# Altium PCB ST_linkV2.PcbDoc
Units mil, origin at the board's own origin, x right, y up, seen from the top; angles counter-clockwise.
Board outline 1200 x 600 mil, 2 copper layers (Top Layer, Bottom Layer); 31 components, 25 nets, 122 pads, 17 vias.
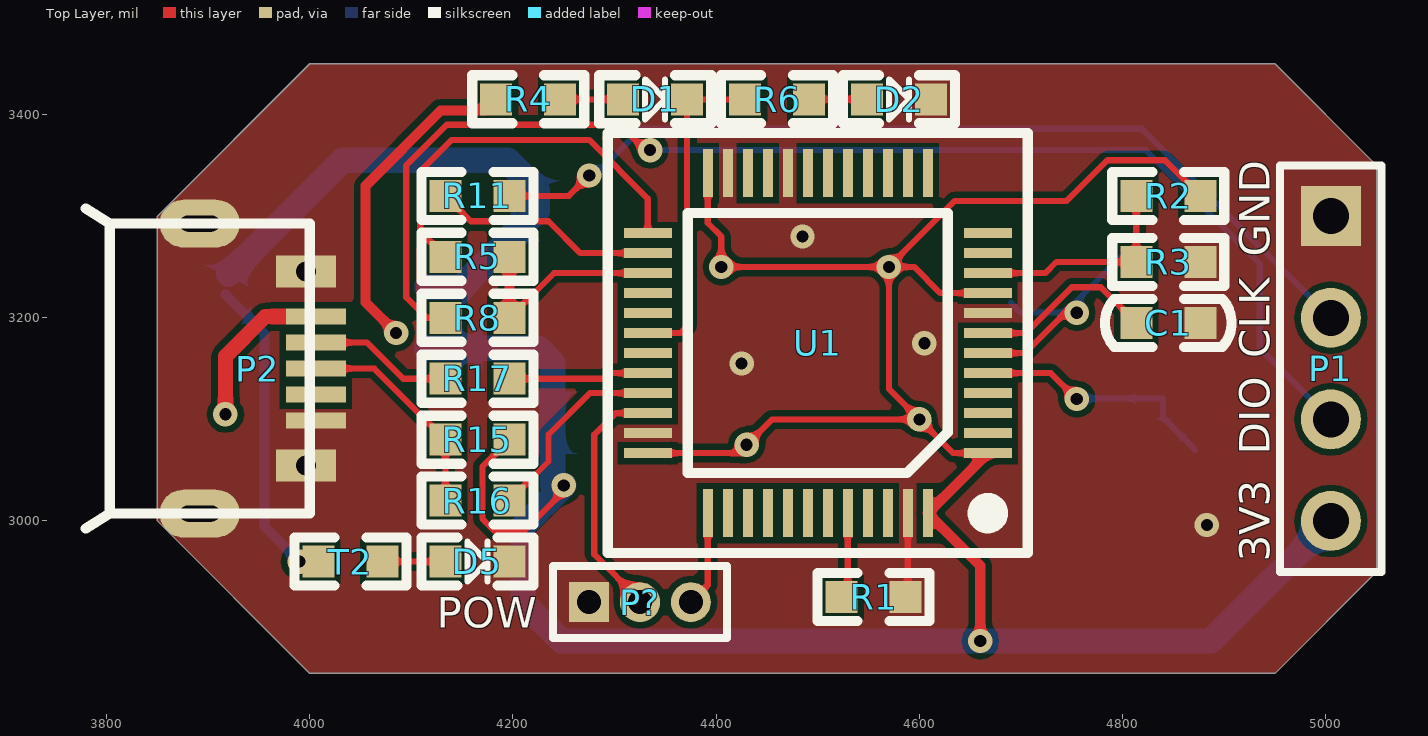
[diagram p0: Top Layer view]
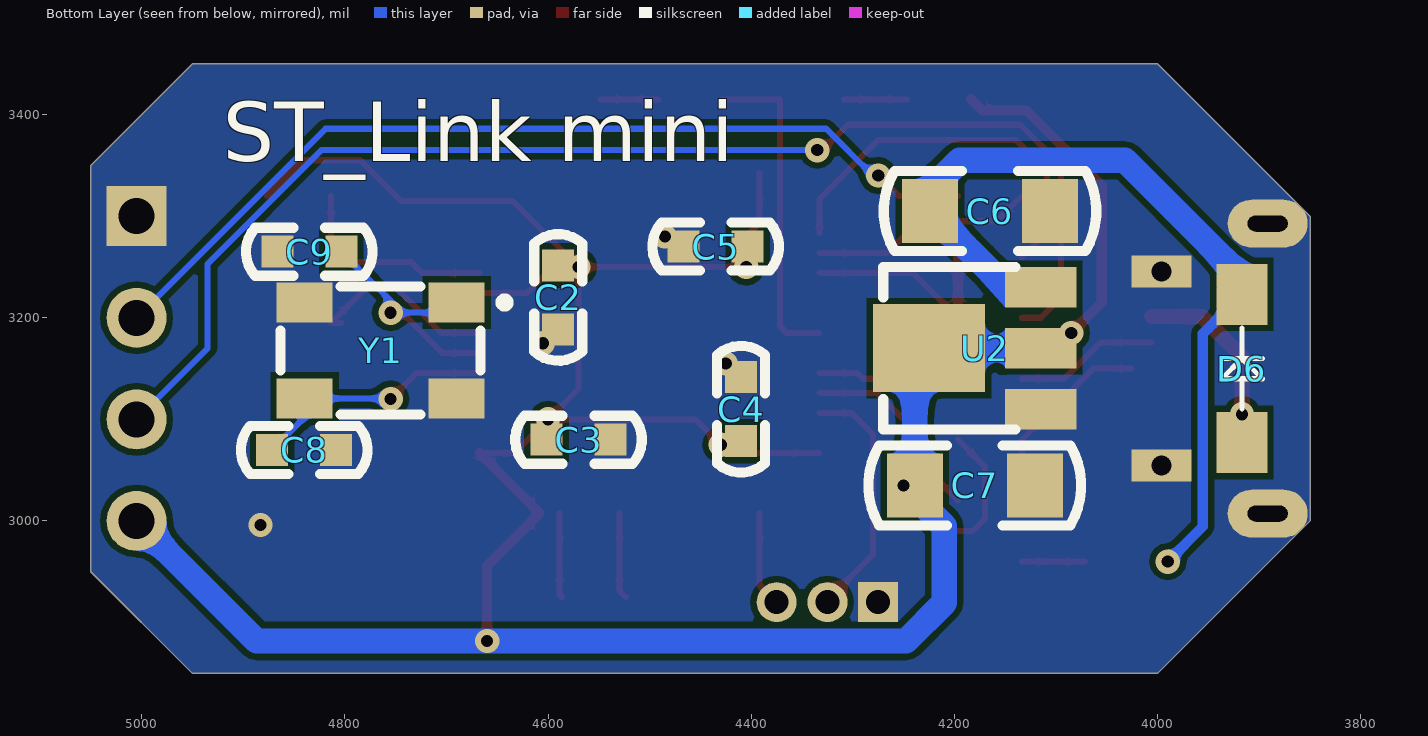
[diagram p1: Bottom Layer view, seen from below]
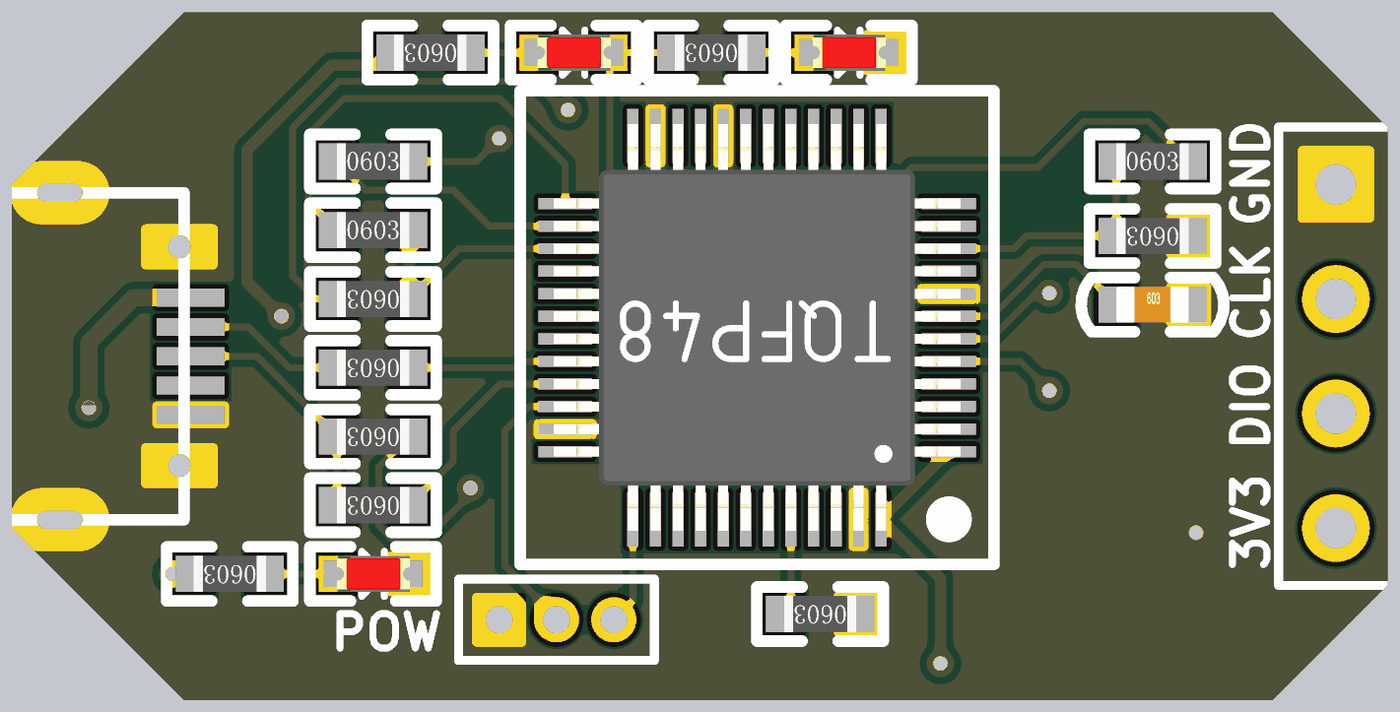
[diagram p2: 3D render of the assembled board from above, using the file's embedded part models]
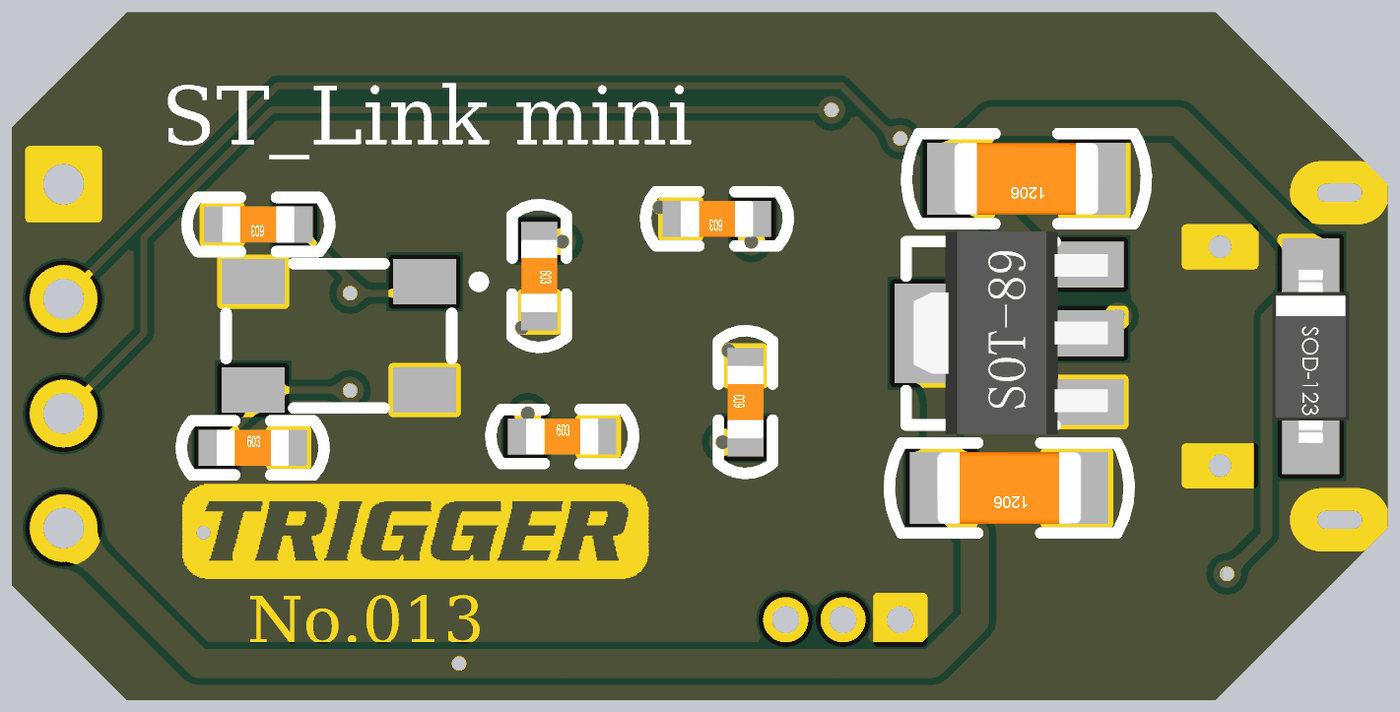
[diagram p3: 3D render of the assembled board from below, using the file's embedded part models]

## Layer stack, top to bottom
Top Solder: solder mask 0.4, Solder Resist, Dk 3.5
Top Layer: signal copper 1.4
Dielectric 1: dielectric 12.6, FR-4, Dk 4.8
Bottom Layer: signal copper 1.4
Bottom Solder: solder mask 0.4, Solder Resist, Dk 3.5

## Board outline
3850,3000 3850,3300 4000,3450 4950,3450 5050,3350 5050,2950 4950,2850 4000,2850

## Design rules (kind name [scope] priority, off if disabled: settings)
Clearance [All] p1: gap=6
ComponentClearance [All] p1 off: gap=10 collisioncheckmode=3 verticalgap=10 showdistances=FALSE
HoleSize [All] p1 off: absolutevalues=TRUE maxlimit=100 minlimit=1 maxpercent=80.000 minpercent=20.000
HoleToHoleClearance [All] p1 off: gap=10 allowstackedmicrovias=TRUE
LayerPairs [All] p1 off: enforce=TRUE
MinimumSolderMaskSliver [All] p1 off: minsoldermaskwidth=10
NetAntennae [All] p1 off: netantennaetolerance=0
PlaneConnect [All] p1: planeconnectstyle=Direct reliefexpansion=20 reliefentries=4 reliefconductorwidth=10 reliefairgap=10
PolygonConnect [All] p1: connectstyle=Direct reliefconductorwidth=10 reliefentries=4 polygonreliefangle="90 Angle" airgapwidth=10
RoutingVias [All] p1: holewidth=12 width=24 viastyle="Through Hole" minholewidth=12 minwidth=24 maxholewidth=12 maxwidth=24
SilkToSilkClearance [All] p1 off: silktosilkclearance=10
SilkToSolderMaskClearance [IsPad] p1 off: minsilkscreentomaskgap=10 clearancetoexposedcopper=TRUE
SolderMaskExpansion [All] p1: expansion=4
Width [All] p1: maxlimit=100 minlimit=6 preferedwidth=10
21 further rules are at their usual default settings.

## Components (designator, comment, footprint, x,y, rotation, side; value= is the part's Value field where it differs from the comment)
C1 "104" 电容_C0603 4845,3195 r0 top
C2 "104" 电容_C0603 4590,3220 r270 bottom
C3 "104" 电容_C0603 4570,3080 r180 bottom
C4 "104" 电容_C0603 4410,3110 r90 bottom
C5 "104" 电容_C0603 4435,3270 r0 bottom
C6 "10uF" 电容_C1206 4165,3305 r0 bottom
C7 "22uF" 电容_C1206 4180,3035 r0 bottom
C8 "22P" 电容_C0603 4840,3070 r180 bottom
C9 "22P" 电容_C0603 4835,3265 r0 bottom
D1 "red" LED_0603 4340,3415 r0 top
D2 "green" LED_0603 4580,3415 r0 top
D5 "red" LED_0603 4165,2960 r0 top
D6 "1N4007" 二极管_SOD-123 3917,3150 r90 bottom
P1 "Header 4" HDR1X4 5005,3300 r270 top
P2 "MICRO USB" "接插件_MICRO 牛角插座 USB 卷边" 4000,3150 r90 top
P? "MHDR1X3" MHDR1X3 4275,2920 r0 top
R1 "10K" 电阻_R0603 4555,2925 r180 top
R2 "4.7K" 电阻_R0603 4845,3320 r0 top
R3 "4.7K" 电阻_R0603 4845,3255 r180 top
R4 "1.5K" 电阻_R0603 4215,3415 r180 top
R5 "100R" 电阻_R0603 4165,3260 r0 top
R6 "1.5K" 电阻_R0603 4460,3415 r180 top
R8 "22R" 电阻_R0603 4165,3200 r180 top
R11 "22R" 电阻_R0603 4165,3320 r0 top
R15 "1.5K" 电阻_R0603 4165,3080 r180 top
R16 "4.7K" 电阻_R0603 4165,3020 r180 top
R17 "4.7K" 电阻_R0603 4165,3140 r180 top
T2 "1.5K" 电阻_R0603 4040,2960 r180 top
U1 "STM32F103C8T6" ST主控_LQFP48 4500,3175 r180 top
U2 "AMS1117" 稳压芯片_SOT-89 4115,3110 r90 bottom
Y1 "12M" 晶振_5032 4690,3215 r0 bottom

## Footprints (in the part's own frame and the unit in brackets; to place one, negate y for a bottom-side part, rotate by r counter-clockwise, add the part's x,y. Pads: shape width x height; smd on the part's side, far side on the other; paste and mask are expansions set on the pad)
HDR1X4 [mm] "Connector; Header; 4 Position"
  rect 1.5x1.5 hole 0.9: 1(0,0)
  round 1.5 hole 0.9: 2(2.54,0) 3(5.08,0) 4(7.62,0)
  silkscreen extent -1.27,-1.27 8.89,1.27
LED_0603 [mm]
  rect 0.8x0.8 smd paste-0.1: A(-0.8,0) K(0.8,0)
  silkscreen extent -1.4,-0.6 1.4,0.6, body extent -0.8,-0.4 0.82,0.4, height 0.6
MHDR1X3 [mm] "Connector; Header; 3 Position"
  rect 1x1 hole 0.6: 1(0,0)
  round 1 hole 0.6: 2(1.27,0) 3(2.54,0)
  silkscreen extent -0.9,-0.9 3.44,0.9
ST主控_LQFP48 [mm]
  rect 1.2x0.25 smd: 1(-4.25,2.75) 2(-4.25,2.25) 3(-4.25,1.75) 4(-4.25,1.25) 5(-4.25,0.75) 6(-4.25,0.25) 7(-4.25,-0.25) 8(-4.25,-0.75) 9(-4.25,-1.25) 10(-4.25,-1.75) 11(-4.25,-2.25) 12(-4.25,-2.75) 25(4.25,-2.75) 26(4.25,-2.25) 27(4.25,-1.75) 28(4.25,-1.25) 29(4.25,-0.75) 30(4.25,-0.25) 31(4.25,0.25) 32(4.25,0.75) 33(4.25,1.25) 34(4.25,1.75) 35(4.25,2.25) 36(4.25,2.75)
  rect 0.25x1.2 smd: 13(-2.75,-4.25) 14(-2.25,-4.25) 15(-1.75,-4.25) 16(-1.25,-4.25) 17(-0.75,-4.25) 18(-0.25,-4.25) 19(0.25,-4.25) 20(0.75,-4.25) 21(1.25,-4.25) 22(1.75,-4.25) 23(2.25,-4.25) 24(2.75,-4.25) 37(2.75,4.25) 38(2.25,4.25) 39(1.75,4.25) 40(1.25,4.25) 41(0.75,4.25) 42(0.25,4.25) 43(-0.25,4.25) 44(-0.75,4.25) 45(-1.25,4.25) 46(-1.75,4.25) 47(-2.25,4.25) 48(-2.75,4.25)
  silkscreen extent -5.25,-5.25 5.25,5.25, body extent -4.51,-4.51 4.51,4.51, height 1.1
二极管_SOD-123 [mil]
  rect 60x50 smd: A(-72.83,0) K(72.83,0)
  silkscreen extent -40,-20 40,20, body extent -76,-33 76,33, height 56
"接插件_MICRO 牛角插座 USB 卷边" [mm]
  oval 1.2x2 hole 0.4 slot 1 at 90 deg: 0(-3.625,2.75) 0(3.625,2.75)
  rect 0.8x1.5 hole 0.5: 0(-2.425,0.1) 0(2.425,0.1)
  rect 0.4x1.5 smd: 1(1.3,-0.15) 2(0.65,-0.15) 3(0,-0.15) 4(-0.65,-0.15) 5(-1.3,-0.15)
  silkscreen extent -4,0 4,5.6
晶振_5032 [mm]
  rect 1.4x1 smd: 0(0,2.4) 0(3.8,0) 1(0,0) 2(3.8,2.4)
  silkscreen extent -1.3,-0.4 4.4,2.8
电容_C0603 [mm]
  rect 0.8x0.8 smd: 1(-0.8,0) 2(0.8,0)
  silkscreen extent -1.58,-0.6 1.58,0.6, body extent -0.8,-0.4 0.8,0.4, height 0.3
电容_C1206 [mm]
  rect 1.4x1.6 smd: 1(-1.5,0) 2(1.5,0)
  silkscreen extent -2.66,-1 2.66,1, body extent -1.6,-0.8 1.6,0.8, height 1
电阻_R0603 [mm]
  rect 0.8x0.8 smd: 1(-0.8,0) 2(0.8,0)
  silkscreen extent -1.4,-0.6 1.4,0.6, body extent -0.8,-0.4 0.8,0.4, height 0.45
稳压芯片_SOT-89 [mil]
  rect 40x70 smd: 1(0,0) 2(60,0) 3(120,0)
  rect 86.61x110.24 smd: 2(60,110)
  silkscreen extent -20,25 140,155, body extent -28,-21 149,148, height 59

## Part data
C1 C2 C3 C4 C5 C6 C7 C8 C9: library part cap
D1 D2 D5: library part LED
D6: library part Diode
P1: "Header, 4-Pin"
P2: library part "MICRO USB 5PIN"
P?: "Header, 3-Pin"
R1 R2 R3 R4 R5 R6 R8 R11 R15 R16 R17 T2: library part Res
Y1: library part XTAL_B

## Via types
v1: diameter 24, hole 12, Top Layer to Bottom Layer, tented both sides, 17 vias

## Nets (pads, with @x,y where several pads share a name; then routed paths per layer and width w, separated by ;. In a path a pad name is that pad's centre, name@x,y a point inside that pad or via, vN(x,y) a via of type N, cw(c..) or ccw(c..) an arc to the next point about the centre after c; other vN are vias at no path point)
3V3: C2.1 C3.1 C4.1 C5.1 C7.2 P1.4 R2.2 R4.2 R15.1 U1.1 U1.9 U1.24 U1.36 U1.48 U2.2 | length 3250.1
  Top Layer w6: R15.1 4170,3053.5 4170,3002.27 4182.27,2990 4210.72,2990 4250,3029.28 v1(4250,3035) ; U1.36 4421.73,3066.73 v1(4430,3075) 4455,3100 v1(4600,3100) ; U1.24 4391.73,3293.27 4405,3280 v1(4405,3250) v1(4570,3250) ; U1.1 4633.27,3066.73 v1(4600,3100) ; U1.9 4620.79,3224.21 4595,3250 v1(4570,3250) ; R2.2 4841.5,3355 4785,3355 4745,3315 4635,3315 v1(4570,3250) ; v1(4570,3250) 4570,3130 v1(4600,3100)
  Top Layer w10: v1(4085,3185) 4055,3215 4055,3330 4129,3404 4172.5,3404 R4.2 ; v1(4660,2881.81) 4660,2955.94 U1.48 U1.1
  Bottom Layer w25: U2.2@4115,3170 4225,3170 4239.06,3155.94 C7.2 ; v1(4250,3035) 4210,2995 4210,2919.47 4247.65,2881.81 v1(4660,2881.81) 4886.81,2881.81 P1.4
5V: C6.2 D6.K T2.2 U2.3 | length 816.7
  Bottom Layer w10: D6.K 3955.54,3184.3 3955.54,2994.46 v1(3990,2960)
  Bottom Layer w25: D6.K@3920,3242.83 4032.16,3355 4195,3355 4224.06,3325.94 C6.2 4149.06,3230 U2.3
BT0: R1.2 U1.44 | length 85.2
  Top Layer w6: R1.2 4529.53,2931.02 U1.44
GND: C1.2 C2.2 C3.2 C4.2 C5.2 C6.1 C7.1 C8.2 C9.2 D2.K D5.K P1.1 P2.0 P2.5 P?.1 R1.1 R3.1 U1.8 U1.20 U1.23 U1.35 U1.47 U2.1 Y1.0 | length 83.5
  Top Layer w6: R1.1 4588.58,2927.09 U1.47
  other v1: 4883,2996 4425,3155 4605,3175 4485,3280
NetD1_A: D1.A R4.1 | length 62
  Top Layer w6: R4.1 D1.A
NetD2_A: D2.A R6.1 | length 57
  Top Layer w6: R6.1 D2.A
NetD5_A: D5.A T2.1 | length 62
  Top Layer w6: T2.1 D5.A
NetP1_2: P1.2 R11.2 | length 912.9
  Top Layer w6: R11.2 4255,3320 v1(4275,3340)
  Bottom Layer w6: v1(4275,3340) 4280.3,3340 4326.3,3386 4819,3386 P1.2
NetP1_3: P1.3 R8.2 | length 1272.1
  Top Layer w6: R8.2 4115,3200 4095,3220 4095,3350 4135,3390 4305,3390 4330,3365 v1(4335,3365)
  Bottom Layer w6: v1(4335,3365) 4823.03,3365 4935,3253.03 4935,3170 P1.3
NetP2_2: P2.2 R17.2 | length 142.3
  Top Layer w6: P2.2 4056.41,3175.59 4092,3140 R17.2
NetP2_3: P2.3 R15.2 R16.2 | length 196.6
  Top Layer w6: P2.3@4025.91,3150 4063.5,3150 R15.2 R16.2
NetR2_1: R2.1 R3.2 U1.10 | length 215.8
  Top Layer w6: U1.10 4723.9,3243.9 4735,3255 R3.2 R2.1
NRST0: C1.1 U1.7 | length 189.7
  Top Layer w6: U1.7 4704.84,3184.84 4750,3230 4778.5,3230 C1.1 C1.1@4803.2,3195
OS_IN: C8.1 U1.5 Y1.2 | length 246.8
  Top Layer w6: U1.5 4729.53,3145.47 v1(4755,3120)
  Bottom Layer w6: v1(4755,3120) 4755.51,3120.51 Y1.2 4839.61,3101.89 C8.1
OS_OUT: C9.1 U1.6 Y1.1 | length 253.4
  Top Layer w6: U1.6 4703.66,3165.16 4743.5,3205 v1(4755,3205)
  Bottom Layer w6: Y1.1 4700,3205 v1(4755,3205) 4755,3216.5 C9.1
RX: U1.31
SCKS: P?.3 U1.37 | length 94.6
  Top Layer w6: P?.3 4391.73,2936.73 U1.37
SDIOS: P?.2 U1.34 | length 245.1
  Top Layer w6: P?.2 4325,2922.1 4280,2967.1 4280,3085 4301.1,3106.1 U1.34
"T JTCK": R11.1 U1.26 | length 222.5
  Top Layer w6: R11.1 4158.5,3295 4235,3295 4266.42,3263.58 U1.26
"T JTMS": R5.2 R8.1 U1.27 | length 214.4
  Top Layer w6: R8.1 4240.39,3243.9 U1.27
  Top Layer w10: R8.1 R5.2
"T SWDIO IN": R5.1 U1.25 | length 389.1
  Top Layer w6: R5.1 4108.76,3284.75 4108.76,3344.21 4139.55,3375 4275,3375 4332.68,3317.32 U1.25
TX: D1.K R6.2 U1.30 | length 322.1
  Top Layer w6: U1.30 4364.84,3184.84 4371.5,3191.5 D1.K R6.2
USB_DM: R17.1 U1.32 | length 138.4
  Top Layer w6: R17.1 4290,3140 4295.47,3145.47 U1.32
USB_DP: R16.1 U1.33 | length 195.5
  Top Layer w6: R16.1 4235,3058.5 4235,3085 4275.79,3125.79 U1.33
VIN: D6.A P2.1 | length 162.1
  Top Layer w15: v1(3917,3105) 3917,3162 3956.18,3201.18 P2.1
pads on no net: P2.4 U1.2 U1.3 U1.4 U1.11 U1.12 U1.13 U1.14 U1.15 U1.16 U1.17 U1.18 U1.19 U1.21 U1.22 U1.28 U1.29 U1.38 U1.39 U1.40 U1.41 U1.42 U1.43 U1.45 U1.46

## Polygon pours and split planes (outlines as drawn)
GND on Bottom Layer "GND" (solid, remove dead copper, pour order 0): 3850,3300 4000,3450 4950,3450 5050,3350 5050,2950 4950,2850 4000,2850 3850,3000
GND on Top Layer "GND" (solid, remove dead copper, pour order 2): 3850,3300 4000,3450 4950,3450 5050,3350 5050,2950 4950,2850 4000,2850 3850,3000

## Silkscreen, mask and mechanical layers (free items; w line width, h text height)
Top Overlay:
  text "GND" at 4945,3260 h30 r90
  text "CLK" at 4945,3160 h30 r90
  text "DIO" at 4945,3065 h30 r90
  text "3V3" at 4945,2960 h30 r90
  text "POW" at 4125,2895 h30
Bottom Overlay:
  text "ST_Link mini" at 4920,3335 h100
Bottom Solder:
  drawing of 583 lines, arcs and shapes, not listed
  text "No.013" at 4845,2900 h80
Mechanical 1:
  lines w6: 3850,3000 3850,3300 ; 3850,3000 4000,2850 ; 3850,3000 4000,2850 ; 3850,3000 3850,3300 ; 3850,3300 4000,3450 ; 3850,3300 4000,3450 ; 4000,2850 4950,2850 ; 4000,2850 4950,2850 ; 4000,3450 4950,3450 ; 4000,3450 4950,3450 ; 4950,2850 5050,2950 ; 4950,2850 5050,2950 ; 4950,3450 5050,3350 ; 4950,3450 5050,3350 ; 5050,2950 5050,3350 ; 5050,2950 5050,3350